# Altium PCB Fibre-Optic-Interface_layout11.PcbDoc
Units mil, origin at the board's own origin, x right, y up, seen from the top; angles counter-clockwise.
Board outline 6117.13 x 3149.61 mil, 4 copper layers (Top Layer, Middle Layer 1, Middle Layer 2, Bottom Layer), stack 23.756 mil thick; 92 components, 41 nets, 316 pads, 176 vias.
Unrouted connection lines stored in the file: 6.
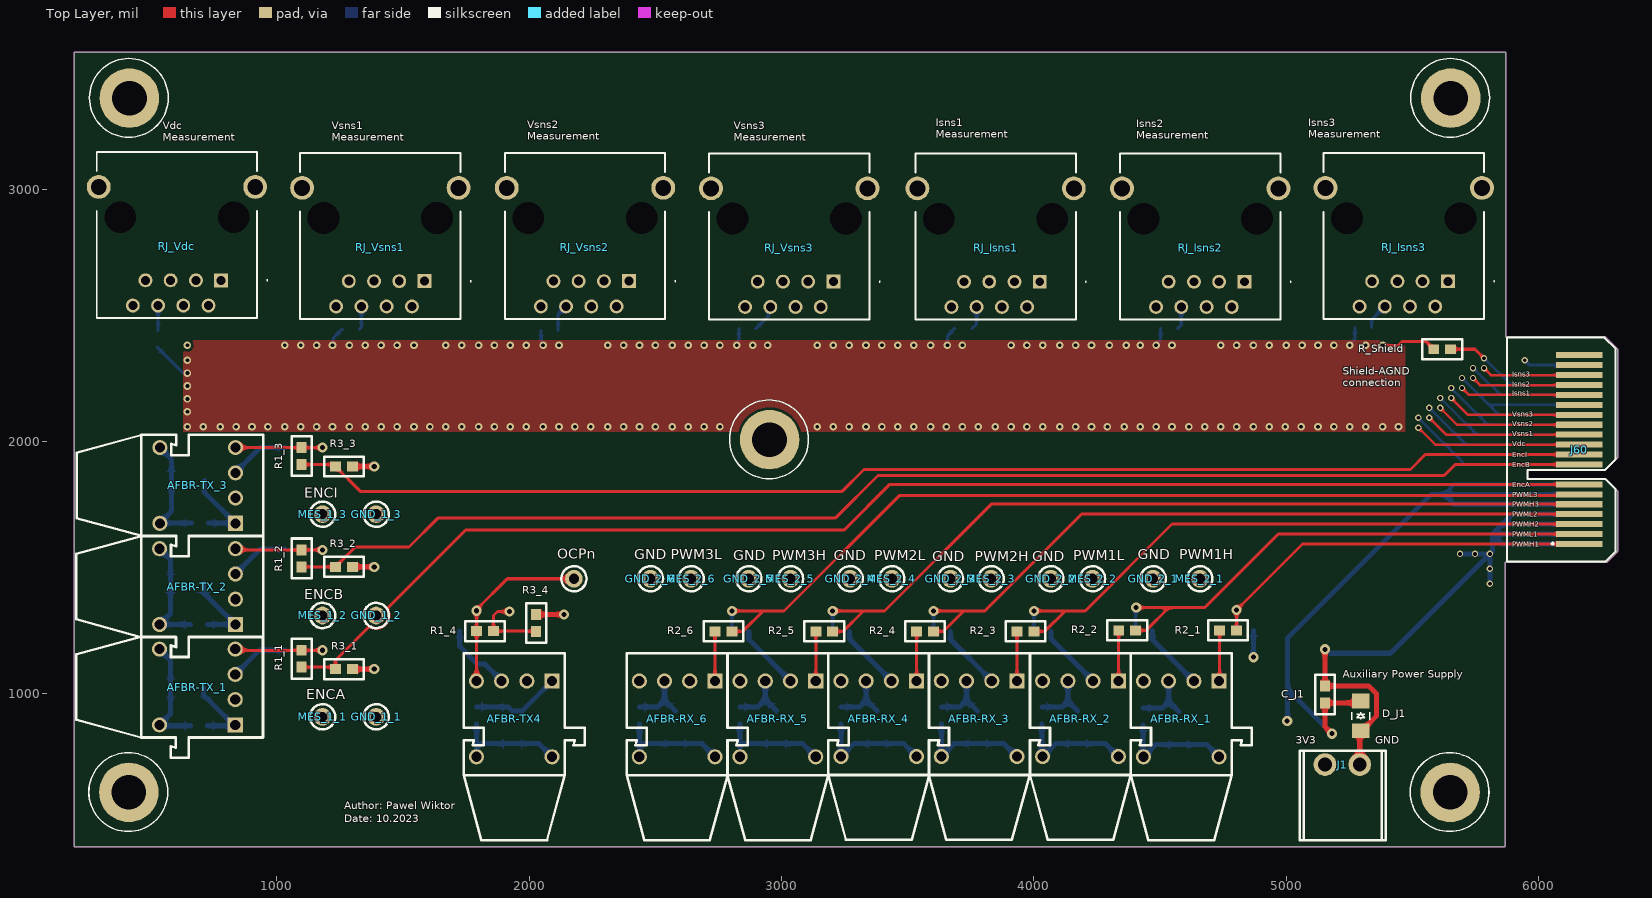
[diagram p0: Top Layer view]
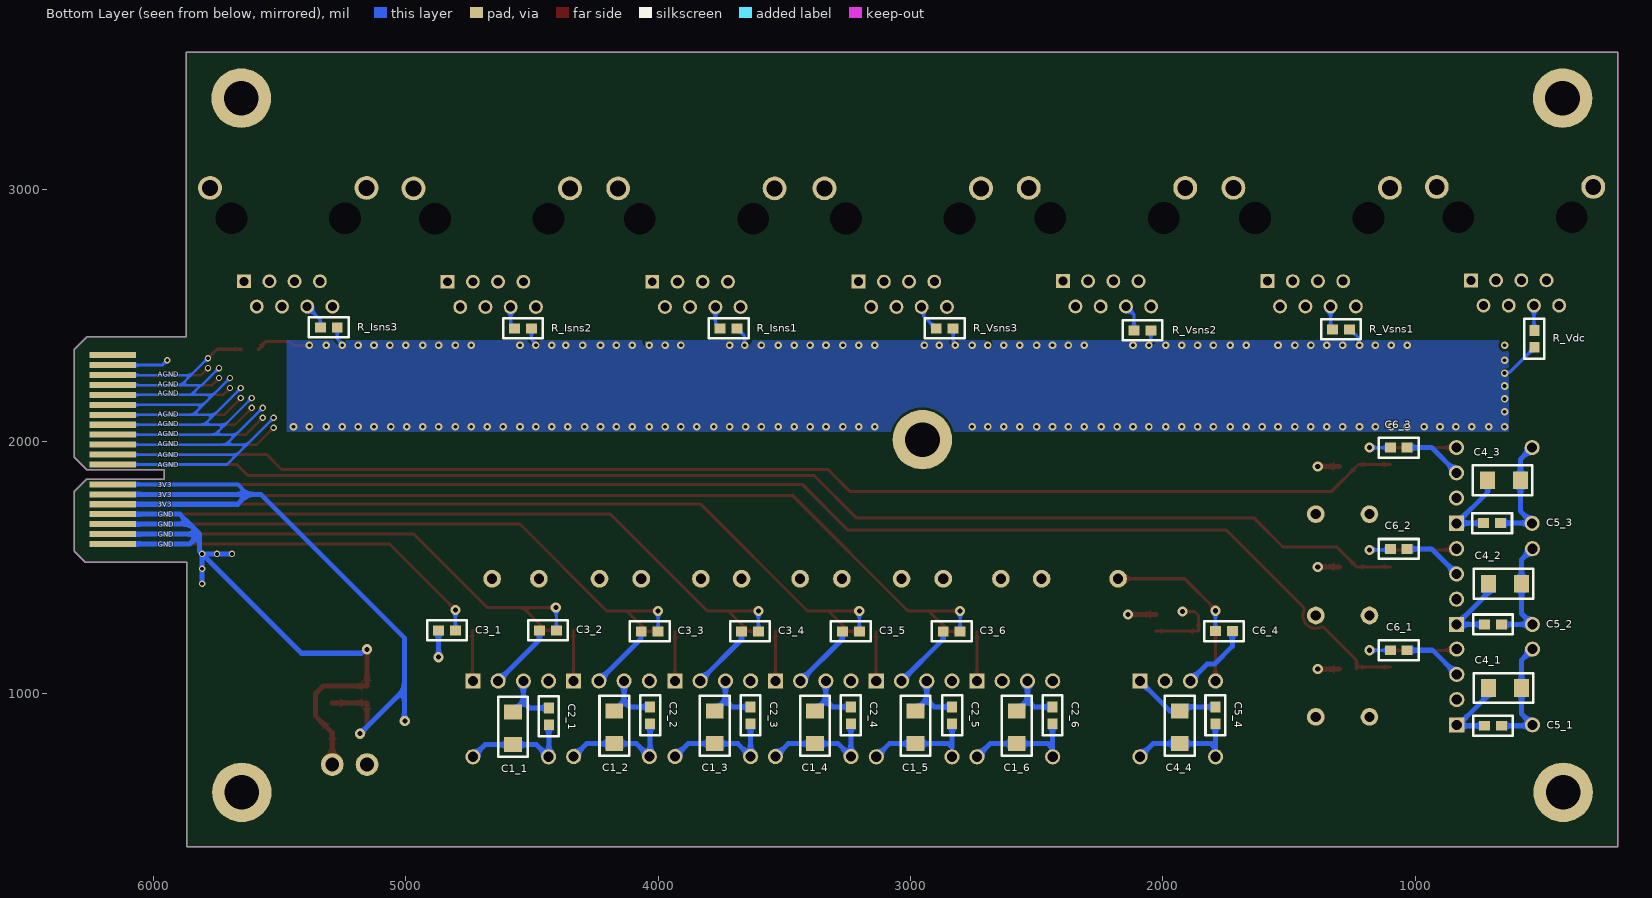
[diagram p1: Bottom Layer view, seen from below]
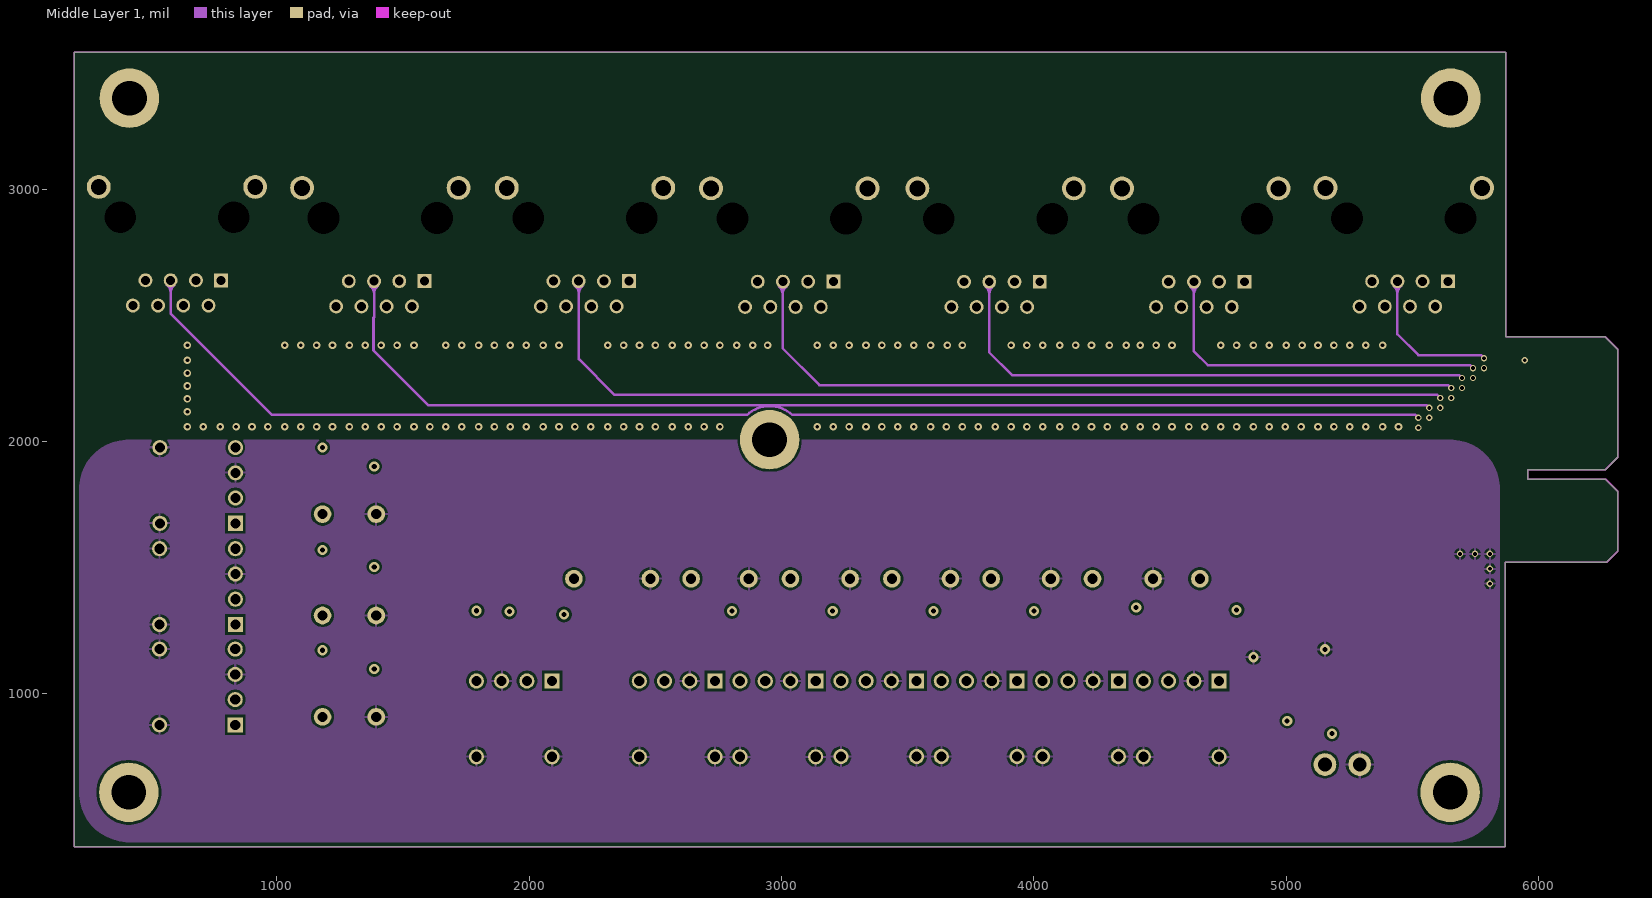
[diagram p2: Middle Layer 1]
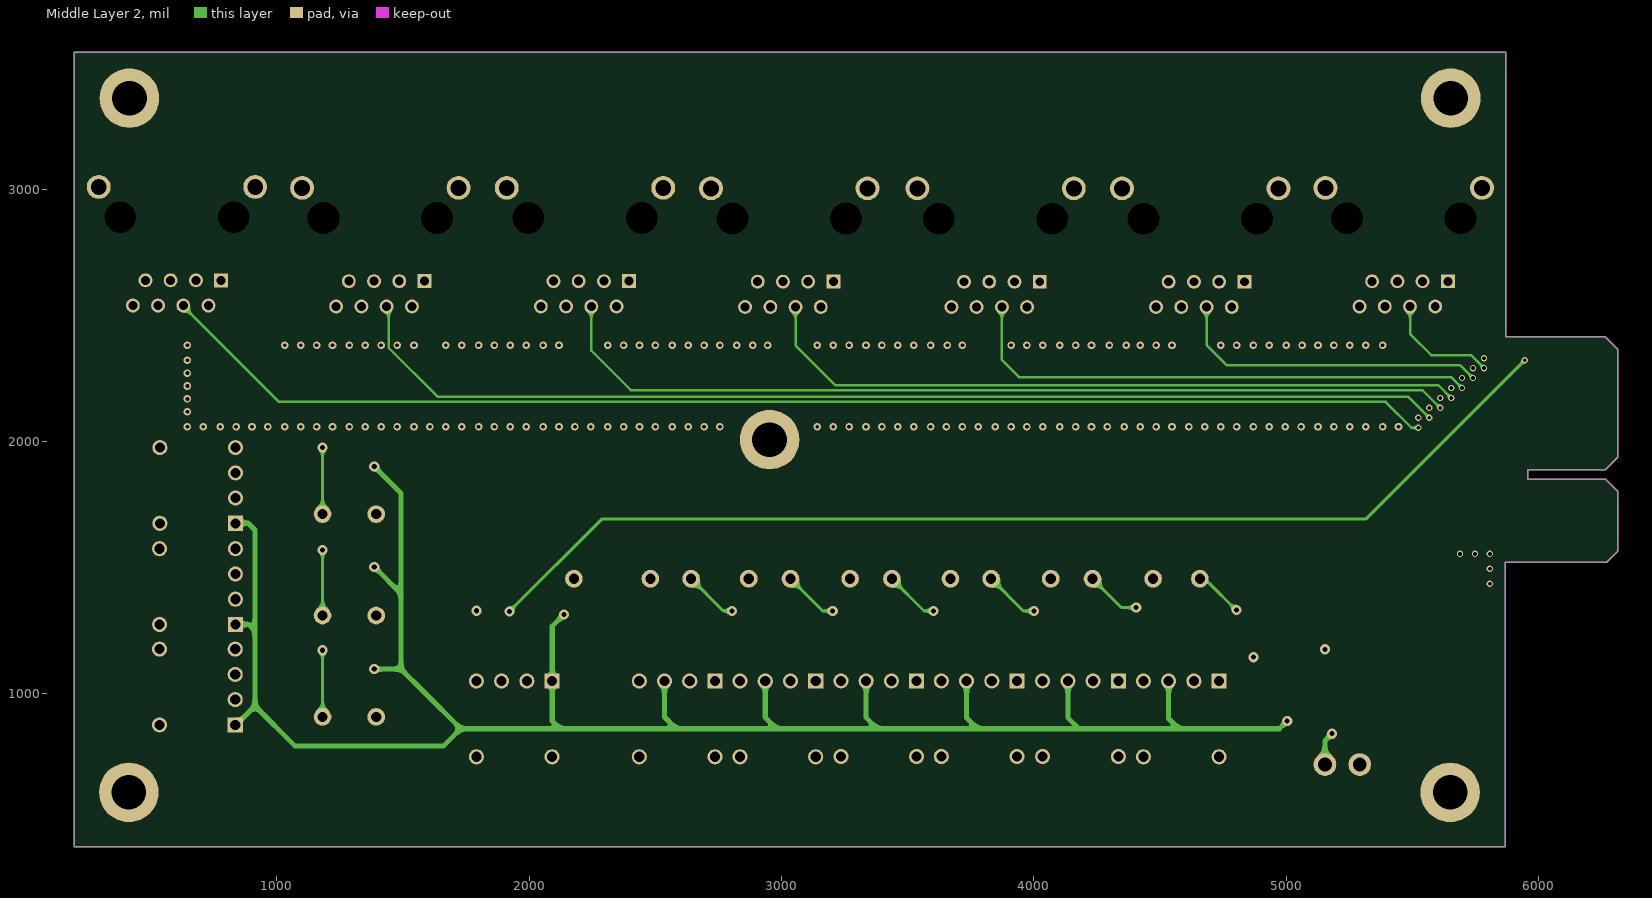
[diagram p3: Middle Layer 2]
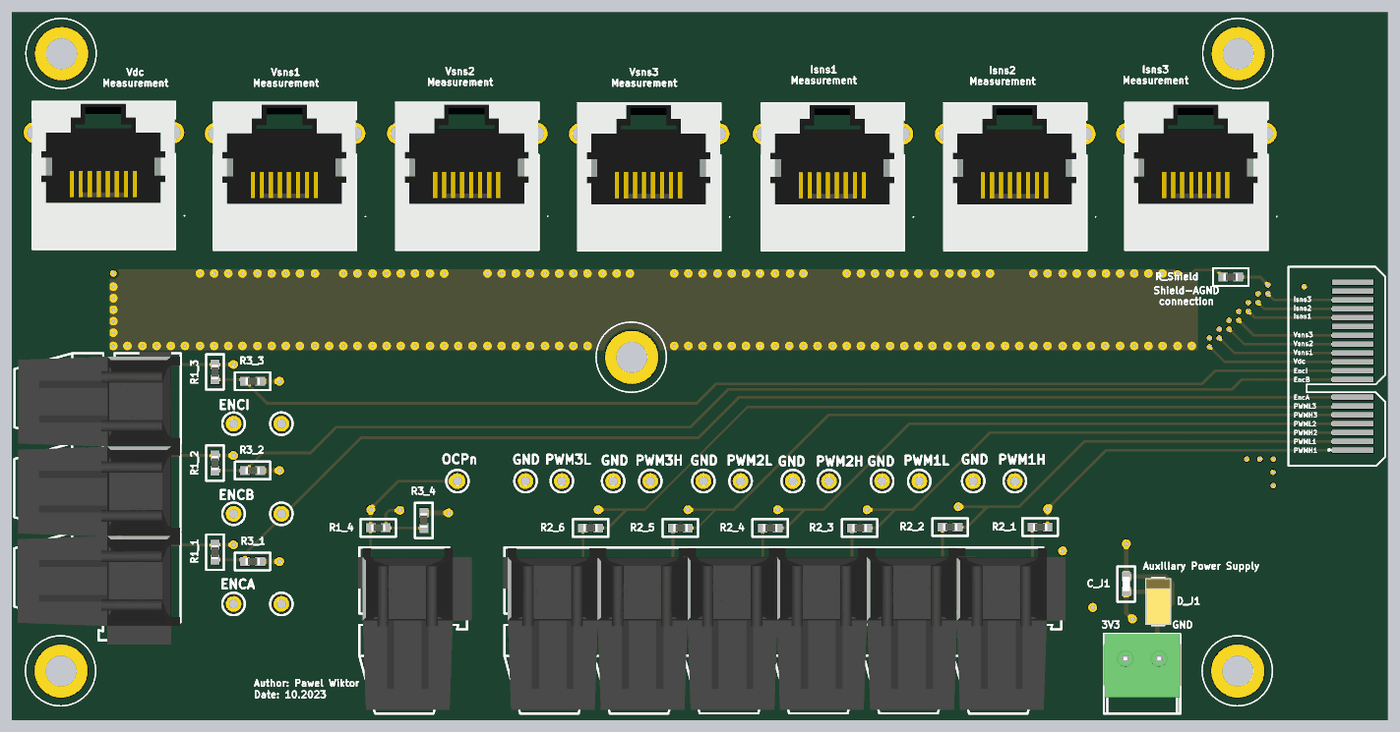
[diagram p4: 3D render of the assembled board from above, using the file's embedded part models]
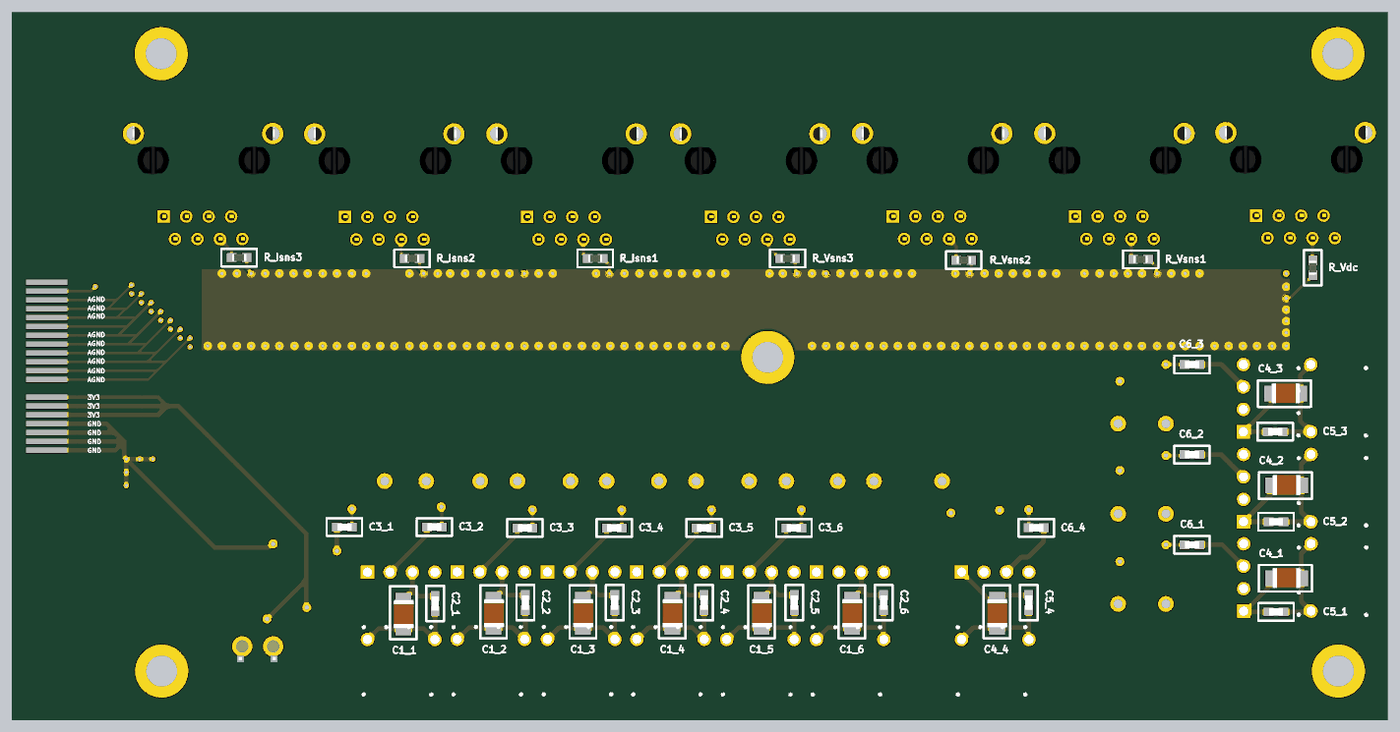
[diagram p5: 3D render of the assembled board from below, using the file's embedded part models]

## Layer stack, top to bottom
Top Solder: solder mask 0.4, Solder Resist, Dk 3.5
Top Layer: signal copper 1.4
Dielectric 2: prepreg 2.8, PP-006, Dk 4.1
Middle Layer 1: signal copper 1.378
Dielectric 1: dielectric 12.6, FR-4, Dk 4.8
Middle Layer 2: signal copper 1.378
Dielectric 3: prepreg 2.8, PP-006, Dk 4.1
Bottom Layer: signal copper 1.4
Bottom Solder: solder mask 0.4, Solder Resist, Dk 3.5

## Board outline
5868.11,393.7 5868.11,1521.65 6269.69,1521.65 6312.99,1564.96 6312.99,1803.15 6265.75,1850.39 5957.68,1850.39 5957.68,1888.78 6264.76,1888.78 6313.98,1937.99 6313.98,2365.16 6263.78,2415.35 5870.08,2415.35 5870.08,3543.31 842.52,3543.31 196.85,3543.31 196.85,393.7

## Design rules (kind name [scope] priority, off if disabled: settings)
Clearance Clearance_Mechanical [OnLayer('Mechanical 2') or OnLayer('Keep-Out Layer')] p1: gap=5 ignorepadtopadclearanceinfootprint=FALSE
Clearance Clearance_Power [InNet('3.3V') vs InNet('3.3V')] p2: gap=10 ignorepadtopadclearanceinfootprint=FALSE
Clearance Clearance_Signal [All] p3: gap=10 ignorepadtopadclearanceinfootprint=FALSE
ComponentClearance ComponentClearance_TX/RX [HasFootprint('AFBR-TX/RX-HORIZONTAL')] p1: gap=0 collisioncheckmode=3 verticalgap=0 showdistances=FALSE
ComponentClearance [All] p2: gap=10 collisioncheckmode=3 verticalgap=10 showdistances=FALSE
HoleSize [All] p1: absolutevalues=TRUE maxlimit=150 minlimit=1 maxpercent=80.000 minpercent=20.000
MinimumSolderMaskSliver [All] p1: minsoldermaskwidth=5
PolygonConnect PolygonConnect_Shield [InNet('Shield') vs InNet('Shield')] p1: connectstyle=Direct reliefconductorwidth=10 reliefentries=4 polygonreliefangle="90 Angle" airgapwidth=10
PolygonConnect [All] p2: connectstyle=Relief reliefconductorwidth=10 reliefentries=4 polygonreliefangle="90 Angle" airgapwidth=10
RoutingVias RoutingVias_Analog [All] p1: holewidth=15 width=25 viastyle="Through Hole" minholewidth=10 minwidth=20 maxholewidth=20 maxwidth=30
RoutingVias RoutingVias_Shield [All] p2: holewidth=15 width=30 viastyle="Through Hole" minholewidth=10 minwidth=20 maxholewidth=30 maxwidth=40
RoutingVias [All] p3: holewidth=20 width=40 viastyle="Through Hole" minholewidth=10 minwidth=30 maxholewidth=30 maxwidth=60
ShortCircuit [All] p1: allowed=TRUE
SilkToSilkClearance SilkToSilkClearance_Mechanical [All] p1: silktosilkclearance=0
SilkToSilkClearance [All] p2: silktosilkclearance=10
SilkToSolderMaskClearance [IsPad] p1: minsilkscreentomaskgap=4 clearancetoexposedcopper=TRUE
SolderMaskExpansion [All] p1: expansion=4 istentingtop=FALSE
UnRoutedNet [All] p1: checkbadconnections=TRUE
Width Width_AGND [InNet('AGND')] p1: maxlimit=20 minlimit=10 preferedwidth=12
Width Width_GND [InNet('GND')] p2: maxlimit=30 minlimit=15 preferedwidth=20
Width Width_Power [InNet('3.3V')] p3: maxlimit=30 minlimit=15 preferedwidth=20
Width Width_Signal [All] p4: maxlimit=20 minlimit=10 preferedwidth=12
23 further rules are at their usual default settings.

## Classes and differential pairs
component class AFBR-TX4: C4_4 C5_4 C6_4 OCPn R1_4 R3_4
channel class AFBR-TX-fiber_optic_transmiter: AFBR-TX1 AFBR-TX2 AFBR-TX3
channel class AFBR-RX-fiber_optic_reciever: AFBR-RX1 AFBR-RX2 AFBR-RX3 AFBR-RX4 AFBR-RX5 AFBR-RX6
component class Fibre-Optic-Interface_main: C_J1 D_J1 J1 J60 R_Isns1 R_Isns2 R_Isns3 R_Shield R_Vdc R_Vsns1 R_Vsns2 R_Vsns3 RJ_Isns1 RJ_Isns2 RJ_Isns3 RJ_Vdc RJ_Vsns1 RJ_Vsns2 RJ_Vsns3
component class AFBR-TX3: C4_3 C5_3 C6_3 GND_1_3 MES_1_3 R1_3 R3_3
component class AFBR-TX2: C4_2 C5_2 C6_2 GND_1_2 MES_1_2 R1_2 R3_2
component class AFBR-TX1: C4_1 C5_1 C6_1 GND_1_1 MES_1_1 R1_1 R3_1
component class AFBR-RX6: C1_6 C2_6 C3_6 GND_2_6 MES_2_6 R2_6
component class AFBR-RX5: C1_5 C2_5 C3_5 GND_2_5 MES_2_5 R2_5
component class AFBR-RX4: C1_4 C2_4 C3_4 GND_2_4 MES_2_4 R2_4
component class AFBR-RX3: C1_3 C2_3 C3_3 GND_2_3 MES_2_3 R2_3
component class AFBR-RX2: C1_2 C2_2 C3_2 GND_2_2 MES_2_2 R2_2
component class AFBR-RX1: C1_1 C2_1 C3_1 GND_2_1 MES_2_1 R2_1

## Components (designator, comment, footprint, x,y, rotation, side; value= is the part's Value field where it differs from the comment)
AFBR-RX_1 "AFBR-2539Z" AFBR-TX/RX-HORIZONTAL 4583.86,901.18 r90 top
AFBR-RX_2 "AFBR-2539Z" AFBR-TX/RX-HORIZONTAL 4184.65,901.97 r90 top
AFBR-RX_3 "AFBR-2539Z" AFBR-TX/RX-HORIZONTAL 3783.07,901.97 r90 top
AFBR-RX_4 "AFBR-2539Z" AFBR-TX/RX-HORIZONTAL 3385.43,901.97 r90 top
AFBR-RX_5 "AFBR-2539Z" AFBR-TX/RX-HORIZONTAL 2985.43,901.18 r90 top
AFBR-RX_6 "AFBR-2539Z" AFBR-TX/RX-HORIZONTAL 2586.22,901.18 r90 top
AFBR-TX4 "AFBR-2539Z" AFBR-TX/RX-HORIZONTAL 1940.55,901.18 r90 top
AFBR-TX_1 "AFBR-2539Z" AFBR-TX/RX-HORIZONTAL 685.04,1027.56 r0 top
AFBR-TX_2 "AFBR-2539Z" AFBR-TX/RX-HORIZONTAL 685.43,1425.59 r0 top
AFBR-TX_3 "AFBR-2539Z" AFBR-TX/RX-HORIZONTAL 686.22,1826.38 r0 top
C1_1 "10uF" 1206 4574.8,864.13 r270 bottom (schematic designator C1)
C1_2 "10uF" 1206 4173.23,868.15 r270 bottom (schematic designator C1)
C1_3 "10uF" 1206 3775.59,868.07 r270 bottom (schematic designator C1)
C1_4 "10uF" 1206 3377.95,868.07 r270 bottom (schematic designator C1)
C1_5 "10uF" 1206 2980.32,868.15 r270 bottom (schematic designator C1)
C1_6 "10uF" 1206 2578.74,868.07 r270 bottom (schematic designator C1)
C2_1 "100nF" 0603C 4433.07,911.42 r270 bottom (schematic designator C2)
C2_2 "100nF" 0603C 4031.5,915.35 r270 bottom (schematic designator C2)
C2_3 "100nF" 0603C 3633.86,915.35 r270 bottom (schematic designator C2)
C2_4 "100nF" 0603C 3236.22,915.35 r270 bottom (schematic designator C2)
C2_5 "100nF" 0603C 2834.65,915.35 r270 bottom (schematic designator C2)
C2_6 "100nF" 0603C 2437.01,915.35 r270 bottom (schematic designator C2)
C3_1 "10pF" 0603C 4836.61,1251.97 r0 bottom (schematic designator C3)
C3_2 "10pF" 0603C 4436.59,1252.11 r0 bottom (schematic designator C3)
C3_3 "10pF" 0603C 4033.47,1248.03 r0 bottom (schematic designator C3)
C3_4 "10pF" 0603C 3635.83,1248.03 r0 bottom (schematic designator C3)
C3_5 "10pF" 0603C 3236.22,1248.03 r0 bottom (schematic designator C3)
C3_6 "10pF" 0603C 2836.61,1248.03 r0 bottom (schematic designator C3)
C4_1 "10uF" 1206 643.66,1023.62 r180 bottom (schematic designator C4)
C4_2 "10uF" 1206 643.66,1437.01 r180 bottom (schematic designator C4)
C4_3 "10uF" 1206 647.6,1846.46 r180 bottom (schematic designator C4)
C4_4 "10uF" 1206 1933.07,868.07 r270 bottom
C5_1 "100nF" 0603C 690.95,874.02 r180 bottom (schematic designator C5)
C5_2 "100nF" 0603C 690.95,1275.59 r180 bottom (schematic designator C5)
C5_3 "100nF" 0603C 694.88,1677.17 r180 bottom (schematic designator C5)
C5_4 "100nF" 0603C 1791.34,915.35 r270 bottom
C6_1 "10pF" 0603C 1064.96,1173.23 r180 bottom (schematic designator C6)
C6_2 "10pF" 0603C 1064.96,1574.8 r180 bottom (schematic designator C6)
C6_3 "10pF" 0603C 1064.96,1976.38 r180 bottom (schematic designator C6)
C6_4 "10pF" 0603C 1757.88,1248.82 r180 bottom
C_J1 "10uF" 0603C 5153.54,998.03 r90 top
D_J1 "DIODE_ZENER" "Mini MELF - D" 5295.28,913.39 r270 top
GND_1_1 "PK_1" PK 1393.7,909.45 r90 top (schematic designator GND_1)
GND_1_2 "PK_1" PK 1393.7,1311.02 r90 top (schematic designator GND_1)
GND_1_3 "PK_1" PK 1393.7,1712.6 r90 top (schematic designator GND_1)
GND_2_1 "PK_1" PK 4472.44,1456.69 r90 top (schematic designator GND_2)
GND_2_2 "PK_1" PK 4066.93,1456.69 r90 top (schematic designator GND_2)
GND_2_3 "PK_1" PK 3669.29,1456.69 r90 top (schematic designator GND_2)
GND_2_4 "PK_1" PK 3271.65,1456.69 r90 top (schematic designator GND_2)
GND_2_5 "PK_1" PK 2870.08,1456.69 r90 top (schematic designator GND_2)
GND_2_6 "PK_1" PK 2480.32,1456.69 r90 top (schematic designator GND_2)
J1 "Header_2" TBG2-3.5MM_H 5153.54,720.47 r0 top
J60 "MEC1-120-02-F-D-EM2" J60_Connector 6059.06,2007.87 r0 top
MES_1_1 "PK_1" PK 1181.1,909.45 r90 top (schematic designator MES_1)
MES_1_2 "PK_1" PK 1181.1,1311.02 r90 top (schematic designator MES_1)
MES_1_3 "PK_1" PK 1181.1,1712.6 r90 top (schematic designator MES_1)
MES_2_1 "PK_1" PK 4657.48,1456.69 r90 top (schematic designator MES_2)
MES_2_2 "PK_1" PK 4232.28,1456.69 r90 top (schematic designator MES_2)
MES_2_3 "PK_1" PK 3830.71,1456.69 r90 top (schematic designator MES_2)
MES_2_4 "PK_1" PK 3437.01,1456.69 r90 top (schematic designator MES_2)
MES_2_5 "PK_1" PK 3035.43,1456.69 r90 top (schematic designator MES_2)
MES_2_6 "PK_1" PK 2641.73,1456.69 r90 top (schematic designator MES_2)
OCPn "PK_1" PK 2177.17,1456.69 r90 top
R1_1 "100R" 0603R 1098.43,1139.76 r270 top (schematic designator R1)
R1_2 "100R" 0603R 1098.43,1537.4 r270 top (schematic designator R1)
R1_3 "100R" 0603R 1098.43,1942.91 r270 top (schematic designator R1)
R1_4 "100R" 0603R 1824.8,1248.82 r0 top
R2_1 "100R" 0603R 4769.69,1251.97 r0 top (schematic designator R2)
R2_2 "100R" 0603R 4369.66,1252.11 r0 top (schematic designator R2)
R2_3 "100R" 0603R 3966.53,1248.03 r0 top (schematic designator R2)
R2_4 "100R" 0603R 3568.9,1248.03 r0 top (schematic designator R2)
R2_5 "100R" 0603R 3169.29,1248.03 r0 top (schematic designator R2)
R2_6 "100R" 0603R 2769.69,1248.03 r0 top (schematic designator R2)
R3_1 "4.7k" 0603R 1265.75,1098.43 r0 top (schematic designator R3)
R3_2 "4.7k" 0603R 1265.75,1503.94 r0 top (schematic designator R3)
R3_3 "4.7k" 0603R 1265.75,1901.57 r0 top (schematic designator R3)
R3_4 "4.7k" 0603R 2027.56,1281.5 r90 top
R_Isns1 "0" 0603R 3720.47,2448.82 r180 bottom
R_Isns2 "0" 0603R 4535.43,2448.82 r180 bottom
R_Isns3 "0" 0603R 5305.12,2452.76 r180 bottom
R_Shield "0" 0603R 5618.11,2366.14 r0 top
R_Vdc "0" 0603R 527.56,2407.48 r270 bottom
R_Vsns1 "0" 0603R 1293.31,2444.88 r180 bottom
R_Vsns2 "0" 0603R 2080.71,2440.94 r180 bottom
R_Vsns3 "0" 0603R 2864.17,2448.82 r180 bottom
RJ_Isns1 "RJ45 Vertical" CUC-SP-J1ST-S/R4LT 3803.15,2838.58 r0 top
RJ_Isns2 "RJ45 Vertical" CUC-SP-J1ST-S/R4LT 4614.17,2838.58 r0 top
RJ_Isns3 "RJ45 Vertical" CUC-SP-J1ST-S/R4LT 5420.55,2840.43 r0 top
RJ_Vdc "RJ45 Vertical" CUC-SP-J1ST-S/R4LT 559.13,2844.37 r0 top
RJ_Vsns1 "RJ45 Vertical" CUC-SP-J1ST-S/R4LT 1365.04,2840.83 r0 top
RJ_Vsns2 "RJ45 Vertical" CUC-SP-J1ST-S/R4LT 2176.06,2840.83 r0 top
RJ_Vsns3 "RJ45 Vertical" CUC-SP-J1ST-S/R4LT 2985.51,2838.86 r0 top

## Footprints (in the part's own frame and the unit in brackets; to place one, negate y for a bottom-side part, rotate by r counter-clockwise, add the part's x,y. Pads: shape width x height; smd on the part's side, far side on the other; paste and mask are expansions set on the pad)
0603C [mm]
  rect 1.1x1 smd: 1(-0.85,0) 2(0.85,0)
  silkscreen extent -2,-1 2,1, body extent -0.8,-0.41 0.8,0.41, height 0.74
0603R [mm]
  rect 1.1x1 smd: 1(-0.85,0) 2(0.85,0)
  silkscreen extent -2,-1 2,1, body extent -0.8,-0.4 0.8,0.4, height 0.56
1206 [mil]
  rect 60x70 smd: 1(-65,0) 2(65,0)
  silkscreen extent -124,-59 112,59, body extent -63,-43 63,47, height 63
AFBR-TX/RX-HORIZONTAL [mil]
  rect 60x60 hole 40: 1(150,-150)
  round 60 hole 40: 2(150,-50) 3(150,50) 4(150,150) 5(-150,150) 8(-150,-150)
  silkscreen extent -480,-280 260,200, body extent -464,-299 257,205, height 738
CUC-SP-J1ST-S/R4LT [mm]
  rect 1.4x1.4 hole 0.9: 1(5.588,-5.207)
  round 1.4 hole 0.9: 2(4.318,-7.747) 3(3.048,-5.207) 4(1.778,-7.747) 5(0.508,-5.207) 6(-0.762,-7.747) 7(-2.032,-5.207) 8(-3.302,-7.747)
  round 1.6 hole 3.2 unplated: MH1(6.858,1.143) MH2(-4.572,1.143)
  round 2.4 hole 1.6: MH3(9.018,4.193) MH4(-6.732,4.193)
  silkscreen extent -6.93,-9.01 10.29,7.69, body extent -7.01,-8.99 9.14,7.72, height 16.5
J60_Connector [mil]
  rect 183x24 smd far side: 01(102.36,-413.39) 03(102.36,-374.02) 05(102.36,-334.65) 07(102.36,-295.28) 09(102.36,-255.91) 11(102.36,-216.54) 13(102.36,-177.17) 17(102.36,-98.43) 19(102.36,-59.06) 21(102.36,-19.69) 23(102.36,19.69) 25(102.36,59.06) 27(102.36,98.43) 29(102.36,137.8) 31(102.36,177.17) 33(102.36,216.54) 35(102.36,255.91) 37(102.36,295.28) 39(102.36,334.65)
  rect 183x24 smd: 02(102.36,-413.39) 04(102.36,-374.02) 06(102.36,-334.65) 08(102.36,-295.28) 10(102.36,-255.91) 12(102.36,-216.54) 14(102.36,-177.17) 18(102.36,-98.43) 20(102.36,-59.06) 22(102.36,-19.69) 24(102.36,19.69) 26(102.36,59.06) 28(102.36,98.43) 30(102.36,137.8) 32(102.36,177.17) 34(102.36,216.54) 36(102.36,255.91) 38(102.36,295.28) 40(102.36,334.65)
  silkscreen extent -184,-483 247,404
"Mini MELF - D" [mm]
  rect 1.5x1.8 smd: A(1.5,0) K(-1.5,0)
  silkscreen extent -0.38,-0.91 0.38,0.91, body extent -2.97,-1.46 2.62,1.46, height 2.35
PK [mil]
  round 70 hole 40: 1(0,0)
  silkscreen extent -50,-50 50,50
TBG2-3.5MM_H [mil]
  round 90 hole 55: 1(0,0) 2(137.8,0)
  silkscreen extent -100,-300 240,55, body extent -103,-228 244,55, height 355

## Part data
AFBR-RX_1 AFBR-RX_2 AFBR-RX_3 AFBR-RX_4 AFBR-RX_5 AFBR-RX_6 AFBR-TX4 AFBR-TX_1 AFBR-TX_2 AFBR-TX_3: "Fiber Optic Transmitters, Receivers, Transceivers VL V 50MBd RX inv"
C1_1 C1_2 C1_3 C1_4 C1_5 C1_6 C4_1 C4_2 C4_3 C4_4 C_J1: library part C_1, "Capacitor"
C2_1 C2_2 C2_3 C2_4 C2_5 C2_6 C5_1 C5_2 C5_3 C5_4: library part C, "Capacitor"
C3_1 C3_2 C3_3 C3_4 C3_5 C3_6 C6_1 C6_2 C6_3 C6_4: library part C_3, "Capacitor"
GND_1_1 GND_1_2 GND_1_3 GND_2_1 GND_2_2 GND_2_3 GND_2_4 GND_2_5 GND_2_6 MES_1_1 MES_1_2 MES_1_3 MES_2_1 MES_2_2 MES_2_3 MES_2_4 MES_2_5 MES_2_6 OCPn: "Punkt", ClassName=Mechanical
J60: library part "Control interface connector", "Connector J60"
R1_1 R1_2 R1_3 R1_4 R2_1 R2_2 R2_3 R2_4 R2_5 R2_6: library part R_1
R3_1 R3_2 R3_3 R3_4 R_Isns1 R_Isns2 R_Isns3 R_Shield R_Vdc R_Vsns1 R_Vsns2 R_Vsns3: library part R
RJ_Isns1 RJ_Isns2 RJ_Isns3 RJ_Vdc RJ_Vsns1 RJ_Vsns2 RJ_Vsns3: library part CUC-SP-J1ST-S/R4LT

## Free pads (board coordinates)
  round 236.22 hole 137.79: 1(413.39,610.24) 1(415.65,3361.14) 1(2952.76,2007.87) 1(5649.61,610.24) 1(5651.87,3361.14)

## Via types
v1: diameter 30, hole 15, Top Layer to Bottom Layer, 137 vias
v2: diameter 25, hole 15, Top Layer to Bottom Layer, 20 vias
v3: diameter 40, hole 20, Top Layer to Bottom Layer, 19 vias

## Nets (pads, with @x,y where several pads share a name; then routed paths per layer and width w, separated by ;. In a path a pad name is that pad's centre, name@x,y a point inside that pad or via, vN(x,y) a via of type N, cw(c..) or ccw(c..) an arc to the next point about the centre after c; other vN are vias at no path point)
3.3V: AFBR-RX_1.3 AFBR-RX_2.3 AFBR-RX_3.3 AFBR-RX_4.3 AFBR-RX_5.3 AFBR-RX_6.3 AFBR-TX4.1 AFBR-TX_3.1 C1_1.1 C1_2.1 C1_3.1 C1_4.1 C1_5.1 C1_6.1 C2_1.1 C2_2.1 C2_3.1 C2_4.1 C2_5.1 C2_6.1 C4_1.1 C4_2.1 C4_3.1 C4_4.1 C5_1.1 C5_2.1 C5_3.1 C5_4.1 C_J1.1 D_J1.K J1.1 J60.11 J60.13 R3_1.2 R3_2.2 R3_3.2 R3_4.2 | length 14978.4
  Top Layer w20: R3_1.2 v3(1385.83,1098.43) ; R3_2.2 v3(1385.83,1503.94) ; R3_3.2 v3(1385.83,1901.57) ; R3_4.2 v3(2137.8,1314.96) ; v3(5181.1,842.52) 5153.54,870.08 C_J1.1 D_J1.K@5291.34,964.57
  Middle Layer 2 w20: 835.04,877.56 838.19,877.56 913.39,952.76 ; 835.43,1275.59 889.76,1275.59 913.39,1251.97 ; AFBR-TX_3.1@835.43,1677.17 885.83,1677.17 913.39,1649.61 913.39,1251.97 ; v3(1385.83,1098.43) 1492.13,1098.43 ; v3(1385.83,1503.94) 1492.13,1397.64 ; v3(1385.83,1901.57) 1492.13,1795.28 1492.13,1397.64 ; v3(2137.8,1314.96) 2091.34,1268.5 2091.34,1051.97 2091.34,892.91 2122.05,862.2 ; AFBR-RX_6.3 2536.22,908.66 2582.68,862.2 ; AFBR-RX_5.3 2935.43,907.09 2980.31,862.2 ; AFBR-RX_4.3 3335.43,906.3 3379.53,862.2 ; AFBR-RX_3.3 3733.07,906.3 3777.17,862.2 ; AFBR-RX_2.3 4134.65,906.3 4177.17,863.78 ; AFBR-RX_1.3 4533.86,903.15 4574.8,862.2 ; v3(5003.94,893.7) 4972.44,862.2 3777.17,862.2 ; J1.1 5153.54,814.96 v3(5181.1,842.52) ; 913.39,952.76 1072.84,793.31 1659.45,793.31 1728.35,862.2 ; 913.39,952.76 913.39,1251.97 ; 1492.13,1098.43 1582.68,1007.87 1728.35,862.2 ; 1492.13,1098.43 1492.13,1397.64 ; 1728.35,862.2 2122.05,862.2 ; 2122.05,862.2 2582.68,862.2 ; 2582.68,862.2 2980.31,862.2 ; 2980.31,862.2 3379.53,862.2 ; 3379.53,862.2 3777.17,862.2
  Bottom Layer w15: 5625.98,1791.34 5665.35,1830.71 J60.13
  Bottom Layer w20: C4_1.1 708.66,996.85 831.5,874.02 C5_1.1 ; C4_2.1 708.66,1402.36 835.43,1275.59 C5_2.1 ; C4_3.1 712.6,1800 835.43,1677.17 C5_3.1 ; C5_4.1 1917.32,948.82 C4_4.1 1972.44,933.07 AFBR-TX4.1@2091.34,1051.97 ; C2_6.1 2509.45,948.82 2536.22,975.59 ; AFBR-RX_6.3 2536.22,975.59 ; C1_6.1 2536.22,975.59 ; C2_5.1 2906.22,948.82 2935.43,978.03 ; AFBR-RX_5.3 2935.43,978.03 ; C1_5.1 2935.43,978.03 ; C2_4.1 3308.66,948.82 3335.43,975.59 ; AFBR-RX_4.3 3335.43,975.59 ; C1_4.1 3335.43,975.59 ; C2_3.1 3706.3,948.82 3733.07,975.59 ; AFBR-RX_3.3 3733.07,975.59 ; C1_3.1 3733.07,975.59 ; C2_2.1 4111.73,948.82 4134.65,971.73 ; AFBR-RX_2.3 4134.65,971.73 ; C1_2.1 4134.65,971.73 ; C2_1.1 4508.66,944.88 4533.86,970.08 ; AFBR-RX_1.3 4533.86,970.08 ; C1_1.1 4533.86,970.08 ; v3@5005.91,895.67 5005.91,1017.72 ; v3(5181.1,842.52) 5005.91,1017.72 ; 6153.54,1751.97 5665.35,1751.97 5625.98,1791.34 ; J60.11@6153.54,1791.34 5665.35,1791.34 5625.98,1791.34 ; 5005.91,1017.72 5005.91,1222.44 5574.8,1791.34 5625.98,1791.34
AGND: J60.17 J60.19 J60.21 J60.23 J60.25 J60.27 J60.29 J60.31 J60.33 J60.35 R_Shield.2 RJ_Isns1.5 RJ_Isns2.5 RJ_Isns3.5 RJ_Vdc.5 RJ_Vsns1.5 RJ_Vsns2.5 RJ_Vsns3.5 | length 26546.2
  Top Layer w12: R_Shield.2 5748.03,2366.14 v2(5783.46,2330.71)
  Middle Layer 1 w10: RJ_Vdc.5 579.13,2507.48 980.32,2106.3 2863.14,2106.3 cw(c2952.76,2007.87) 3042.37,2106.3 5511.81,2106.3 v2(5523.62,2094.49) ; RJ_Vsns1.5 1385.04,2493.29 1382.91,2491.16 1382.91,2361.18 1599.19,2144.91 5555.88,2144.91 v2(5566.93,2133.86) ; RJ_Vsns2.5 2196.85,2635.04 2196.85,2326.77 2338.58,2185.04 5598.43,2185.04 v2(5610.24,2173.23) ; RJ_Vsns3.5 3003.94,2632.28 3003.94,2370.08 3149.61,2224.41 5641.73,2224.41 v2(5653.54,2212.6) ; RJ_Isns1.5 3823.15,2354.02 3913.39,2263.78 5685.04,2263.78 v2(5696.85,2251.97) ; RJ_Isns2.5 4634.17,2357.95 4688.98,2303.15 5728.35,2303.15 v2(5740.16,2291.34) ; RJ_Isns3.5 5440.55,2425.59 5523.62,2342.52 5771.65,2342.52 v2(5783.46,2330.71)
  Bottom Layer w10: v2(5523.62,2094.49) 5629.92,1988.19 ; v2(5566.93,2133.86) 5673.23,2027.56 ; v2(5610.24,2173.23) 5716.54,2066.93 ; v2(5653.54,2212.6) 5759.84,2106.3 ; v2(5696.85,2251.97) 5763.78,2185.04 ; 5712.6,1988.19 5673.23,2027.56 ; v2(5740.16,2291.34) 5807.09,2224.41 5811.02,2224.41 ; 5755.91,2027.56 5716.54,2066.93 ; v2(5783.46,2330.71) 5850.39,2263.78 ; 5850.39,2185.04 5811.02,2224.41 ; J60.17 5708.66,1909.45 5669.29,1948.82 ; J60.19 5669.29,1948.82 ; J60.21 5629.92,1988.19 ; J60.23 5673.23,2027.56 ; J60.25 5799.21,2066.93 ; J60.27 5842.52,2106.3 ; J60.29 5803.15,2145.67 ; J60.31 5763.78,2185.04 ; J60.33 5889.76,2224.41 ; J60.35 5850.39,2263.78 ; 5629.92,1988.19 5669.29,1948.82 ; 5716.54,2066.93 5799.21,2066.93 ; 5759.84,2106.3 5842.52,2106.3 ; 5759.84,2106.3 5799.21,2066.93 ; 5763.78,2185.04 5803.15,2145.67 ; 5803.15,2145.67 5842.52,2106.3 ; 5811.02,2224.41 5889.76,2224.41 ; 5850.39,2263.78 5889.76,2224.41
Data_In_EncA: J60.14 R1_1.2 R3_1.1 | length 5413.7
  Top Layer w12: R1_1.2 R3_1.1@1224.41,1106.3 ; R3_1.1 1232.28,1133.86 1363.65,1265.23 1368.62,1265.23 ; 1368.63,1265.23 1371.25,1265.23 ccw(c1393.7,1311.02) 1439.5,1333.47 1439.5,1336.1 1439.5,1341.07 1748.03,1649.61 3248.03,1649.61 3429.13,1830.71 J60.14
Data_In_EncB: J60.18 R1_2.2 R3_2.1 | length 5231
  Top Layer w12: R1_2.2 R3_2.1 1311.02,1582.68 1523.62,1582.68 1637.8,1696.85 3212.6,1696.85 3381.89,1866.14 5625.98,1866.14 5669.29,1909.45 J60.18
Data_In_EncI: J60.20 R1_3.2 R3_3.1 | length 5152.3
  Top Layer w12: R1_3.2 R3_3.1@1224.41,1909.45 ; R3_3.1 1330.71,1803.15 3240.16,1803.15 3326.77,1889.76 5492.13,1889.76 5551.18,1948.82 J60.20@6157.48,1948.82
Data_In_OCPn: J60.37 R1_4.2 R3_4.1 | length 4973.3
  Top Layer w12: R1_4.2@1858.27,1259.84 R1_4.2 ; v3(1921.26,1326.77) 1874.02,1326.77 1858.27,1311.02 R1_4.2 ; R3_4.1 2026.77,1248.82 R1_4.2
  Middle Layer 2 w12: v3(1921.26,1326.77) 2287.4,1692.91 5314.96,1692.91 v2(5944.88,2322.83)
  Bottom Layer w12: v2(5944.88,2322.83) 5964.57,2303.15 J60.37
Data_Out_PWMH1: C3_1.1 MES_2_1.1 R2_1.2 | length 1821.6
  Top Layer w12: R2_1.2 v3(4803.15,1332.95) 5064.69,1594.49 6157.48,1594.49
  Middle Layer 2 w12: MES_2_1.1 4673.18,1456.69 4688.81,1441.06 4692.8,1441.06 4800.91,1332.95 v3(4803.15,1332.95)
  Bottom Layer w12: C3_1.1 v3(4803.15,1332.95)
Data_Out_PWMH2: C3_3.1 MES_2_3.1 R2_3.2 | length 2757.9
  Top Layer w12: R2_3.2 4043.31,1248.03 4122.05,1326.77 ; v3(4000,1329.01) 4203.03,1329.01 4547.24,1673.23 6157.48,1673.23
  Middle Layer 2 w12: MES_2_3.1 3958.39,1329.01 v3(4000,1329.01)
  Bottom Layer w12: C3_3.1 v3(4000,1329.01)
Data_Out_PWMH3: C3_5.1 J60.10 MES_2_5.1 R2_5.2 | length 3583.8
  Top Layer w12: R2_5.2 3244.09,1248.03 3322.83,1326.77 ; v3(3202.76,1329.01) 3407.75,1329.01 3830.71,1751.97 J60.10@6157.48,1751.97
  Middle Layer 2 w12: MES_2_5.1 3163.11,1329.01 v3(3202.76,1329.01)
  Bottom Layer w12: C3_5.1 v3(3202.76,1329.01)
Data_Out_PWML1: C3_2.1 MES_2_2.1 R2_2.2 | length 2354
  Top Layer w12: R2_2.2 4444.74,1252.11 4535.14,1342.52 ; v3(4405.51,1342.52) 4535.14,1342.52 ; 6157.48,1633.86 4968.5,1633.86 4677.17,1342.52 4535.14,1342.52
  Middle Layer 2 w12: MES_2_2.1 4346.46,1342.52 v3(4405.51,1342.52)
  Bottom Layer w12: C3_2.1 4403.12,1340.13 v3(4405.51,1342.52)
Data_Out_PWML2: C3_4.1 MES_2_4.1 R2_4.2 | length 3166.7
  Top Layer w12: R2_4.2 3641.73,1248.03 3722.44,1328.74 ; v3(3602.36,1329.01) 3805.39,1329.01 4188.98,1712.6 6157.48,1712.6
  Middle Layer 2 w12: MES_2_4.1 3564.69,1329.01 v3(3602.36,1329.01)
  Bottom Layer w12: C3_4.1 v3(3602.36,1329.01)
Data_Out_PWML3: C3_6.1 J60.12 MES_2_6.1 R2_6.2 | length 3994.1
  Top Layer w12: R2_6.2 2846.46,1248.03 2925.2,1326.77 ; v3(2803.15,1329.01) 3010.12,1329.01 3468.44,1787.34 J60.12@6157.48,1787.34
  Middle Layer 2 w12: MES_2_6.1 2769.41,1329.01 v3(2803.15,1329.01)
  Bottom Layer w12: C3_6.1 v3(2803.15,1329.01)
GND: AFBR-RX_1.2 AFBR-RX_1.5 AFBR-RX_1.8 AFBR-RX_2.2 AFBR-RX_2.5 AFBR-RX_2.8 AFBR-RX_3.2 AFBR-RX_3.5 AFBR-RX_3.8 AFBR-RX_4.2 AFBR-RX_4.5 AFBR-RX_4.8 AFBR-RX_5.2 AFBR-RX_5.5 AFBR-RX_5.8 AFBR-RX_6.2 AFBR-RX_6.5 AFBR-RX_6.8 AFBR-TX4.3 AFBR-TX4.5 AFBR-TX4.8 AFBR-TX_3.3 AFBR-TX_3.5 AFBR-TX_3.8 C1_1.2 C1_2.2 C1_3.2 C1_4.2 C1_5.2 C1_6.2 C2_1.2 C2_2.2 C2_3.2 C2_4.2 C2_5.2 C2_6.2 C3_1.2 C3_2.2 C3_3.2 C3_4.2 C3_5.2 C3_6.2 C4_1.2 C4_2.2 C4_3.2 C4_4.2 C5_1.2 C5_2.2 C5_3.2 C5_4.2 C6_1.2 C6_2.2 C6_3.2 C6_4.2 C_J1.2 D_J1.A GND_1_1.1 GND_1_2.1 GND_1_3.1 GND_2_1.1 GND_2_2.1 GND_2_3.1 GND_2_4.1 GND_2_5.1 GND_2_6.1 J1.2 | length 10192.9
  Top Layer w20: v3(5153.54,1177.17) C_J1.2 5326.77,1031.49 5358.27,1000 5358.27,913.39 5291.34,846.46 J1.2
  Bottom Layer w20: 535.04,877.56 578.66,921.18 C4_1.2 578.66,1133.94 535.04,1177.56 ; 535.43,1575.59 578.66,1532.36 C4_2.2 578.66,1318.82 535.43,1275.59 C5_2.2 ; AFBR-TX_3.5@535.43,1977.17 582.6,1930 C4_3.2 582.6,1724.33 535.43,1677.17 C5_3.2 ; 538.58,874.02 C5_1.2 ; 835.04,1077.56 930.71,1173.23 C6_1.2 ; 835.43,1475.59 934.65,1574.8 C6_2.2 ; AFBR-TX_3.3@835.43,1877.17 934.65,1976.38 C6_3.2 ; C6_4.2 1724.41,1188.97 1795.28,1118.11 1825.2,1118.11 AFBR-TX4.3@1891.34,1051.97 ; AFBR-TX4.5 1791.34,751.97 1791.34,787.4 ; C5_4.2 1791.34,787.4 ; AFBR-TX4.8 2038.66,803.07 C4_4.2 1807.01,803.07 1791.34,787.4 ; AFBR-RX_6.5 2437.01,751.97 2437.01,787.4 ; C2_6.2 2437.01,787.4 ; AFBR-RX_6.8 2684.33,803.07 C1_6.2 2452.68,803.07 2437.01,787.4 ; C2_5.2 2834.65,787.4 2850.39,803.15 C1_5.2 3083.46,803.15 AFBR-RX_5.8 ; C3_6.2 2870.08,1216.54 AFBR-RX_5.2 ; AFBR-RX_4.5 AFBR-RX_4.5@3236.22,752.76 ; C2_4.2 AFBR-RX_4.5@3236.22,752.76 ; C3_5.2 3269.68,1217.72 AFBR-RX_4.2 ; AFBR-RX_4.8 3484.33,803.07 C1_4.2 3286.54,803.07 AFBR-RX_4.5@3236.22,752.76 ; AFBR-RX_3.5 AFBR-RX_3.5@3633.86,752.76 ; C2_3.2 AFBR-RX_3.5@3633.86,752.76 ; C3_4.2 3669.29,1215.75 AFBR-RX_3.2 ; AFBR-RX_3.8 3881.97,803.07 C1_3.2 3684.17,803.07 AFBR-RX_3.5@3633.86,752.76 ; AFBR-RX_2.5@4031.5,755.12 C2_2.2 ; AFBR-RX_2.5 4085.83,803.15 C1_2.2 4283.46,803.15 AFBR-RX_2.8 ; C3_3.2 4066.93,1219.69 AFBR-RX_2.2 ; AFBR-RX_1.5@4433.07,751.97 C2_1.2 ; AFBR-RX_1.5 4481.81,799.13 C1_1.2 4685.91,799.13 AFBR-RX_1.8 ; C3_2.2 4470.05,1214.99 AFBR-RX_1.2 ; v3(4870.08,1145.67) C3_1.2 ; v3(5153.54,1177.17) 5158.96,1177.17 5174.7,1161.42 5413.39,1161.42 v2(5807.09,1555.12) ; v2(5688.98,1555.12) v2(5748.03,1555.12) v2(5807.09,1555.12) ; v2(5807.09,1437.01) v2(5807.09,1555.12) ; 6153.54,1594.49 5856.3,1594.49 5816.93,1633.86 ; 6153.54,1633.86 5816.93,1633.86 ; 6153.54,1673.23 5856.3,1673.23 ; 6153.54,1712.6 5895.67,1712.6 5856.3,1673.23 ; v2(5807.09,1555.12) 5816.93,1564.96 5816.93,1633.86 ; 5816.93,1633.86 5856.3,1673.23
  other v2: 5807.09,1496.06
LEDact: J60.39
NetAFBR-RX_1_1: AFBR-RX_1.1 R2_1.1 | length 198.4
  Top Layer w12: AFBR-RX_1.1@4736.22,1053.54 R2_1.1
NetAFBR-RX_2_1: AFBR-RX_2.1 R2_2.1 | length 198.6
  Top Layer w12: AFBR-RX_2.1@4336.2,1053.52 R2_2.1
NetAFBR-RX_3_1: AFBR-RX_3.1 R2_3.1 | length 196.1
  Top Layer w12: AFBR-RX_3.1 R2_3.1
NetAFBR-RX_4_1: AFBR-RX_4.1 R2_4.1 | length 196.1
  Top Layer w12: AFBR-RX_4.1 R2_4.1
NetAFBR-RX_5_1: AFBR-RX_5.1 R2_5.1 | length 196.5
  Top Layer w12: AFBR-RX_5.1@3135.83,1051.58 R2_5.1
NetAFBR-RX_6_1: AFBR-RX_6.1 R2_6.1 | length 196.8
  Top Layer w12: AFBR-RX_6.1 R2_6.1
NetAFBR-TX4_4: AFBR-TX4.4 C6_4.1 OCPn.1 R1_4.1 | length 800
  Top Layer w12: AFBR-TX4.4@1791.34,1051.97 R1_4.1 v3(1791.34,1329.8) 1791.34,1334.65 1913.39,1456.69 OCPn.1
  Bottom Layer w12: C6_4.1 v3(1791.34,1329.8)
NetAFBR-TX_1_4: C6_1.1 MES_1_1.1 R1_1.1 | length 688.2
  Top Layer w12: 839.37,1173.23 R1_1.1 v3(1181.1,1173.23)
  Middle Layer 2 w12: MES_1_1.1@1181.1,909.45 v3(1181.1,1173.23)
  Bottom Layer w12: C6_1.1 v3(1181.1,1173.23)
NetAFBR-TX_2_4: C6_2.1 MES_1_2.1 R1_2.1 | length 679.5
  Top Layer w12: 840.16,1570.87 R1_2.1 v3(1181.1,1570.87)
  Middle Layer 2 w12: MES_1_2.1 v3(1181.1,1570.87)
  Bottom Layer w12: C6_2.1@1102.36,1570.87 v3(1181.1,1570.87)
NetAFBR-TX_3_4: AFBR-TX_3.4 C6_3.1 MES_1_3.1 R1_3.1 | length 691.3
  Top Layer w12: AFBR-TX_3.4 R1_3.1 v3(1181.1,1976.38)
  Middle Layer 2 w12: MES_1_3.1 v3(1181.1,1976.38)
  Bottom Layer w12: C6_3.1 v3(1181.1,1976.38)
NetR_Isns1_1: R_Isns1.1 RJ_Isns1.6 | length 93.9
  Bottom Layer w12: R_Isns1.1 3755.9,2448.82 3773.15,2466.06 RJ_Isns1.6
NetR_Isns2_1: R_Isns2.1 RJ_Isns2.6 | length 92
  Bottom Layer w12: R_Isns2.1 4570.49,2448.82 4584.17,2462.5 RJ_Isns2.6
NetR_Isns3_1: R_Isns3.1 RJ_Isns3.6 | length 104.2
  Bottom Layer w12: R_Isns3.1 5338.58,2483.46 RJ_Isns3.6
NetR_Vdc_1: R_Vdc.1 RJ_Vdc.6 | length 99.1
  Bottom Layer w12: R_Vdc.1 529.13,2442.52 RJ_Vdc.6
NetR_Vsns1_1: R_Vsns1.1 RJ_Vsns1.6 | length 94.4
  Bottom Layer w12: R_Vsns1.1 1335.04,2453.15 RJ_Vsns1.6
NetR_Vsns2_1: R_Vsns2.1 RJ_Vsns2.6 | length 108.1
  Bottom Layer w12: R_Vsns2.1 2114.17,2503.29 2146.06,2535.18 RJ_Vsns2.6
NetR_Vsns3_1: R_Vsns3.1 RJ_Vsns3.6 | length 110.2
  Bottom Layer w12: R_Vsns3.1 2899.61,2448.82 2947.26,2496.47 2947.26,2525.61 RJ_Vsns3.6
PGood_EN: J60.38
Shield: R_Isns1.2 R_Isns2.2 R_Isns3.2 R_Shield.1 R_Vdc.2 R_Vsns1.2 R_Vsns2.2 R_Vsns3.2 | length 854
  Top Layer w12: v1(5381.89,2381.89) 5445.16,2381.89 5460.91,2397.64 5553.15,2397.64 5568.99,2381.8 5568.99,2379.83 5582.68,2366.14 R_Shield.1
  Bottom Layer w10: v1@2688.98,2385.83 v1(2692.91,2381.89) ; v1(4035.43,2381.89) 4047.24,2393.7
  Bottom Layer w12: R_Vdc.2 527.56,2372.05 624.51,2275.1 642.23,2275.1 v1(645.67,2271.65) ; v1(1220.47,2381.89) 1223.92,2385.33 1223.92,2410.92 1257.87,2444.88 R_Vsns1.2 ; R_Vsns2.2 2047.25,2394.63 2055.12,2386.76 v1(2055.12,2381.89) ; v1(2822.83,2381.89) 2822.83,2386.76 2830.71,2394.64 R_Vsns3.2 ; v1(3657.48,2381.89) 3657.48,2419.29 3671.35,2433.17 3671.35,2435.13 3685.04,2448.82 R_Isns1.2 ; v1(4484.25,2381.89) 4484.25,2386.76 4501.97,2404.48 R_Isns2.2 ; v1(5251.97,2381.89) 5251.97,2386.76 5271.65,2406.45 R_Isns3.2
  other v1: 645.67,2059.06 708.66,2059.06 775.59,2059.06 838.58,2059.06 901.57,2059.06 964.57,2059.06 1031.5,2059.06 1094.49,2059.06 1157.48,2059.06 1220.47,2059.06 1287.4,2059.06 1350.39,2059.06 1413.39,2059.06 1476.38,2059.06 1543.31,2059.06 1606.3,2059.06 1669.29,2059.06 1732.28,2059.06 1799.21,2059.06 1862.2,2059.06 1925.2,2059.06 1988.19,2059.06 2055.12,2059.06 2118.11,2059.06 2181.1,2059.06 2244.09,2059.06 2311.02,2059.06 2374.02,2059.06 2437.01,2059.06 2500,2059.06 2566.93,2059.06 2629.92,2059.06 2692.91,2059.06 2755.91,2059.06 3141.73,2059.06 3204.72,2059.06 3267.72,2059.06 3334.65,2059.06 3397.64,2059.06 3460.63,2059.06 3523.62,2059.06 3590.55,2059.06 3653.54,2059.06 3716.54,2059.06 3779.53,2059.06 3846.46,2059.06 3909.45,2059.06 3972.44,2059.06 4035.43,2059.06 4102.36,2059.06 4165.35,2059.06 4228.35,2059.06 4291.34,2059.06 4358.27,2059.06 4421.26,2059.06 4484.25,2059.06 4547.24,2059.06 4614.17,2059.06 4677.17,2059.06 4740.16,2059.06 4803.15,2059.06 4870.08,2059.06 4933.07,2059.06 4996.06,2059.06 5059.06,2059.06 5125.98,2059.06 5188.98,2059.06 5251.97,2059.06 5314.96,2059.06 5381.89,2059.06 5444.88,2059.06 645.67,2118.11 645.67,2169.29 645.67,2220.47 645.67,2322.83 1031.5,2381.89 1094.49,2381.89 1157.48,2381.89 1287.4,2381.89 1350.39,2381.89 1412.91,2381.89 1476.38,2381.89 1543.31,2381.89 1669.29,2381.89 1732.28,2381.89 1799.21,2381.89 1862.2,2381.89 1925.2,2381.89 1988.19,2381.89 2118.11,2381.89 2311.02,2381.89 2374.02,2381.89 2437.01,2381.89 2500,2381.89 2566.93,2381.89 2629.92,2381.89 2755.91,2381.89 2885.83,2381.89 2944.88,2381.89 3141.73,2381.89 3204.72,2381.89 3267.72,2381.89 3334.65,2381.89 3397.64,2381.89 3460.63,2381.89 3523.62,2381.89 3590.55,2381.89 3716.54,2381.89 3909.45,2381.89 3972.44,2381.89 4102.36,2381.89 4165.35,2381.89 4228.35,2381.89 4299.21,2381.89 4366.14,2381.89 4421.26,2381.89 4547.24,2381.89 4740.16,2381.89 4803.15,2381.89 4870.08,2381.89 4933.07,2381.89 5000,2381.89 5062.99,2381.89 5125.98,2381.89 5188.98,2381.89 5314.96,2381.89
Signal_Isns1: J60.32 RJ_Isns1.4 | length 2555.6
  Top Layer w10: v2(5696.85,2212.6) 5724.41,2185.04 J60.32
  Middle Layer 2 w10: RJ_Isns1.4 3873.15,2323.7 3940.94,2255.91 5653.54,2255.91 v2(5696.85,2212.6)
Signal_Isns2: J60.34 RJ_Isns2.4 | length 1693.7
  Top Layer w10: v2(5740.16,2251.97) 5767.72,2224.41 J60.34
  Middle Layer 2 w10: RJ_Isns2.4 4684.17,2382.76 4763.78,2303.15 5688.98,2303.15 v2(5740.16,2251.97)
Signal_Isns3: J60.36 RJ_Isns3.4 | length 847
  Top Layer w10: v2(5783.46,2291.34) 5811.02,2263.78 J60.36
  Middle Layer 2 w10: RJ_Isns3.4 5490.55,2426.77 5574.8,2342.52 5732.28,2342.52 v2(5783.46,2291.34)
Signal_Vdc: J60.22 RJ_Vdc.4 | length 5764.2
  Top Layer w10: v2(5523.62,2055.12) 5590.55,1988.19 J60.22
  Middle Layer 2 w10: RJ_Vdc.4@625.66,2539.69 1008.19,2157.17 5393.7,2157.17 5495.75,2055.12 v2(5523.62,2055.12)
Signal_Vsns1: J60.24 RJ_Vsns1.4 | length 5028.2
  Top Layer w10: v2(5566.93,2094.49) 5633.86,2027.56 J60.24
  Middle Layer 2 w10: RJ_Vsns1.4 1442.91,2527.95 1442.91,2372.05 1637.8,2177.17 5484.25,2177.17 v2(5566.93,2094.49)
Signal_Vsns2: J60.26 RJ_Vsns2.4 | length 4212.4
  Top Layer w10: v2(5610.24,2133.86) 5677.17,2066.93 J60.26
  Middle Layer 2 w10: RJ_Vsns2.4 2246.06,2360.24 2402.56,2203.74 5540.35,2203.74 v2(5610.24,2133.86)
Signal_Vsns3: J60.28 RJ_Vsns3.4 | length 3372.3
  Top Layer w10: v2(5653.54,2173.23) 5720.47,2106.3 J60.28
  Middle Layer 2 w10: RJ_Vsns3.4 3055.51,2381.5 3212.6,2224.41 5602.36,2224.41 v2(5653.54,2173.23)
Tsns: J60.40
pads on no net: AFBR-RX_1.4 AFBR-RX_2.4 AFBR-RX_3.4 AFBR-RX_4.4 AFBR-RX_5.4 AFBR-RX_6.4 AFBR-TX4.2 AFBR-TX_1.1 AFBR-TX_1.2 AFBR-TX_1.3 AFBR-TX_1.4 AFBR-TX_1.5 AFBR-TX_1.8 AFBR-TX_2.1 AFBR-TX_2.2 AFBR-TX_2.3 AFBR-TX_2.4 AFBR-TX_2.5 AFBR-TX_2.8 AFBR-TX_3.2 J60.01 J60.02 J60.03 J60.04 J60.05 J60.06 J60.07 J60.08 J60.09 J60.30 RJ_Isns1.1 RJ_Isns1.2 RJ_Isns1.3 RJ_Isns1.7 RJ_Isns1.8 RJ_Isns1.MH1 RJ_Isns1.MH2 RJ_Isns1.MH3 RJ_Isns1.MH4 RJ_Isns2.1 RJ_Isns2.2 RJ_Isns2.3 RJ_Isns2.7 RJ_Isns2.8 RJ_Isns2.MH1 RJ_Isns2.MH2 RJ_Isns2.MH3 RJ_Isns2.MH4 RJ_Isns3.1 RJ_Isns3.2 RJ_Isns3.3 RJ_Isns3.7 RJ_Isns3.8 RJ_Isns3.MH1 RJ_Isns3.MH2 RJ_Isns3.MH3 RJ_Isns3.MH4 RJ_Vdc.1 RJ_Vdc.2 RJ_Vdc.3 RJ_Vdc.7 RJ_Vdc.8 RJ_Vdc.MH1 RJ_Vdc.MH2 RJ_Vdc.MH3 RJ_Vdc.MH4 RJ_Vsns1.1 RJ_Vsns1.2 RJ_Vsns1.3 RJ_Vsns1.7 RJ_Vsns1.8 RJ_Vsns1.MH1 RJ_Vsns1.MH2 RJ_Vsns1.MH3 RJ_Vsns1.MH4 RJ_Vsns2.1 RJ_Vsns2.2 RJ_Vsns2.3 RJ_Vsns2.7 RJ_Vsns2.8 RJ_Vsns2.MH1 RJ_Vsns2.MH2 RJ_Vsns2.MH3 RJ_Vsns2.MH4 RJ_Vsns3.1 RJ_Vsns3.2 RJ_Vsns3.3 RJ_Vsns3.7 RJ_Vsns3.8 RJ_Vsns3.MH1 RJ_Vsns3.MH2 RJ_Vsns3.MH3 RJ_Vsns3.MH4
copper on no net: | length 11.1
  Bottom Layer w10: v1(645.67,2381.89) v1@649.61,2385.83
  Bottom Layer w12: v1@641.73,2385.83 v1(645.67,2381.89)

## Polygon pours and split planes (outlines as drawn)
Shield on Bottom Layer "SHIELD_L04_P003" (solid, pour order 3): 629.92,2401.57 629.92,2039.37 5472.44,2039.37 5472.44,2401.57
Shield on Top Layer "SHIELD_L01_P002" (solid, pour order 2): 5472.44,2039.37 5472.44,2401.57 629.92,2401.57 629.92,2039.37
GND on Middle Layer 1 "GND_L02_P013" (solid, pour order 13): 216.54,1811.02 216.54,610.48 ccw(c413.38,610.23) 413.38,413.39 5649.61,413.39 ccw(c5649.61,610.24) 5846.46,610.24 5846.46,1811.02 ccw(c5649.61,1811.02) 5649.61,2007.87 413.39,2007.87 ccw(c413.39,1811.02)

## Keep-outs
Keep-Out Layer:
  lines w5: 5866.14,393.7 5055.12,393.7 4318.9,393.7 3476.38,393.7 2125.98,393.7 196.85,393.7 196.85,3543.31 842.52,3543.31 2240.16,3543.31 3519.69,3543.31 5039.37,3543.31 5866.14,3543.31 ; 5868.11,393.7 5868.11,1521.65 6269.69,1521.65 6287.4,1539.37 6312.99,1564.96 6312.99,1803.15 6265.75,1850.39 5957.68,1850.39 5957.68,1860.48 5957.68,1888.78 6264.76,1888.78 6312.01,1936.02 6313.98,1937.99 6313.98,2365.16 6263.78,2415.35 5870.08,2415.35 5870.08,3543.31

## Silkscreen, mask and mechanical layers (free items; w line width, h text height)
Top Overlay:
  circle w6: c2950.49,2008.94 r156.21
  circle w6: c5649.61,3362.2 r156.21
  circle w6: c5647.34,611.3 r156.21
  circle w6: c411.12,611.3 r156.21
  circle w6: c413.39,3362.2 r156.21
  text "Isns1 / Measurement" at 3610.48,3204.72 h30
  text "Isns3 / Measurement" at 5086.86,3204.72 h30
  text "Isns2 / Measurement" at 4405.76,3200.79 h30
  text "Vsns2 / Measurement" at 1992.37,3196.85 h30
  text "Vdc / Measurement" at 547.49,3192.91 h30
  text "Vsns1 / Measurement" at 1216.78,3192.91 h30
  text "Vsns3 / Measurement" at 2811.27,3192.91 h30
  text "Isns3" at 5894.76,2256.97 h20
  text "Shield-AGND  / connection" at 5224.65,2220.47 h30
  text "Isns2" at 5894.76,2217.6 h20
  text "Isns1" at 5894.76,2182.17 h20
  text "Vsns3" at 5894.76,2099.49 h20
  text "Vsns2" at 5894.76,2060.12 h20
  text "Vsns1" at 5894.76,2020.75 h20
  text "Vdc" at 5894.76,1981.38 h20
  text "EncI" at 5894.76,1938.07 h20
  text "EncB" at 5894.76,1898.7 h20
  text "EncA" at 5894.76,1819.96 h20
  text "PWML3" at 5894.76,1780.59 h20
  text "ENCI" at 1108.43,1777.72 h40
  text "PWMH3" at 5894.76,1741.22 h20
  text "PWML2" at 5894.76,1701.85 h20
  text "PWMH2" at 5894.76,1662.48 h20
  text "PWML1" at 5894.76,1623.11 h20
  text "PWMH1" at 5894.76,1583.74 h20
  text "GND" at 2415.51,1533.62 h40
  text "PWM3L" at 2561.18,1533.62 h40
  text "GND" at 4411.57,1533.62 h40
  text "PWM1H" at 4576.93,1533.62 h40
  text "GND" at 2809.21,1529.68 h40
  text "PWM3H" at 2962.76,1529.68 h40
  text "GND" at 3206.85,1529.68 h40
  text "PWM2L" at 3368.27,1529.68 h40
  text "PWM1L" at 4155.67,1529.68 h40
  text "GND" at 3596.61,1525.75 h40
  text "PWM2H" at 3765.91,1525.75 h40
  text "GND" at 3994.25,1525.75 h40
  text "ENCB" at 1108.43,1376.14 h40
  text "Auxiliary Power Supply" at 5223.54,1064.24 h30
  text "ENCA" at 1116.3,978.5 h40
  text "3V3" at 5038.5,802.28 h30
  text "GND" at 5353.46,802.28 h30
  text "Author: Pawel Wiktor" at 1266.84,542.43 h30
  text "Date: 10.2023" at 1266.84,491.25 h30
Bottom Overlay:
  text "AGND" at 5983.19,2256.97 h20
  text "AGND" at 5983.19,2217.6 h20
  text "AGND" at 5983.19,2182.17 h20
  text "AGND" at 5983.19,2099.49 h20
  text "AGND" at 5983.19,2060.12 h20
  text "AGND" at 5983.19,2020.75 h20
  text "AGND" at 5983.19,1981.38 h20
  text "AGND" at 5983.19,1938.07 h20
  text "AGND" at 5983.19,1898.7 h20
  text "3V3" at 5983.19,1819.96 h20
  text "3V3" at 5983.19,1780.59 h20
  text "3V3" at 5983.19,1741.22 h20
  text "GND" at 5983.19,1701.85 h20
  text "GND" at 5983.19,1662.48 h20
  text "GND" at 5983.19,1623.11 h20
  text "GND" at 5983.19,1583.74 h20
Mechanical 2:
  lines w5: 5866.14,393.7 5055.12,393.7 4318.9,393.7 3476.38,393.7 2125.98,393.7 196.85,393.7 196.85,3543.31 842.52,3543.31 2240.16,3543.31 3519.69,3543.31 5039.37,3543.31 5870.08,3543.31 5870.08,2415.35 6263.78,2415.35 6313.98,2365.16 6313.98,1937.99 6312.01,1936.02 6264.76,1888.78 5957.68,1888.78 5957.68,1860.48 5957.68,1850.39 6265.75,1850.39 6312.99,1803.15 6312.99,1564.96 6287.4,1539.37 6269.69,1521.65 5868.11,1521.65 5868.11,393.7